# Altium PCB RemoteControlCC1101.PcbDoc
Units mm, origin at the board's own origin, x right, y up, seen from the top; angles counter-clockwise.
Board outline 78.75 x 46.82 mm, 2 copper layers (Top Layer, Bottom Layer); 54 components, 18 nets, 240 pads, 97 vias.
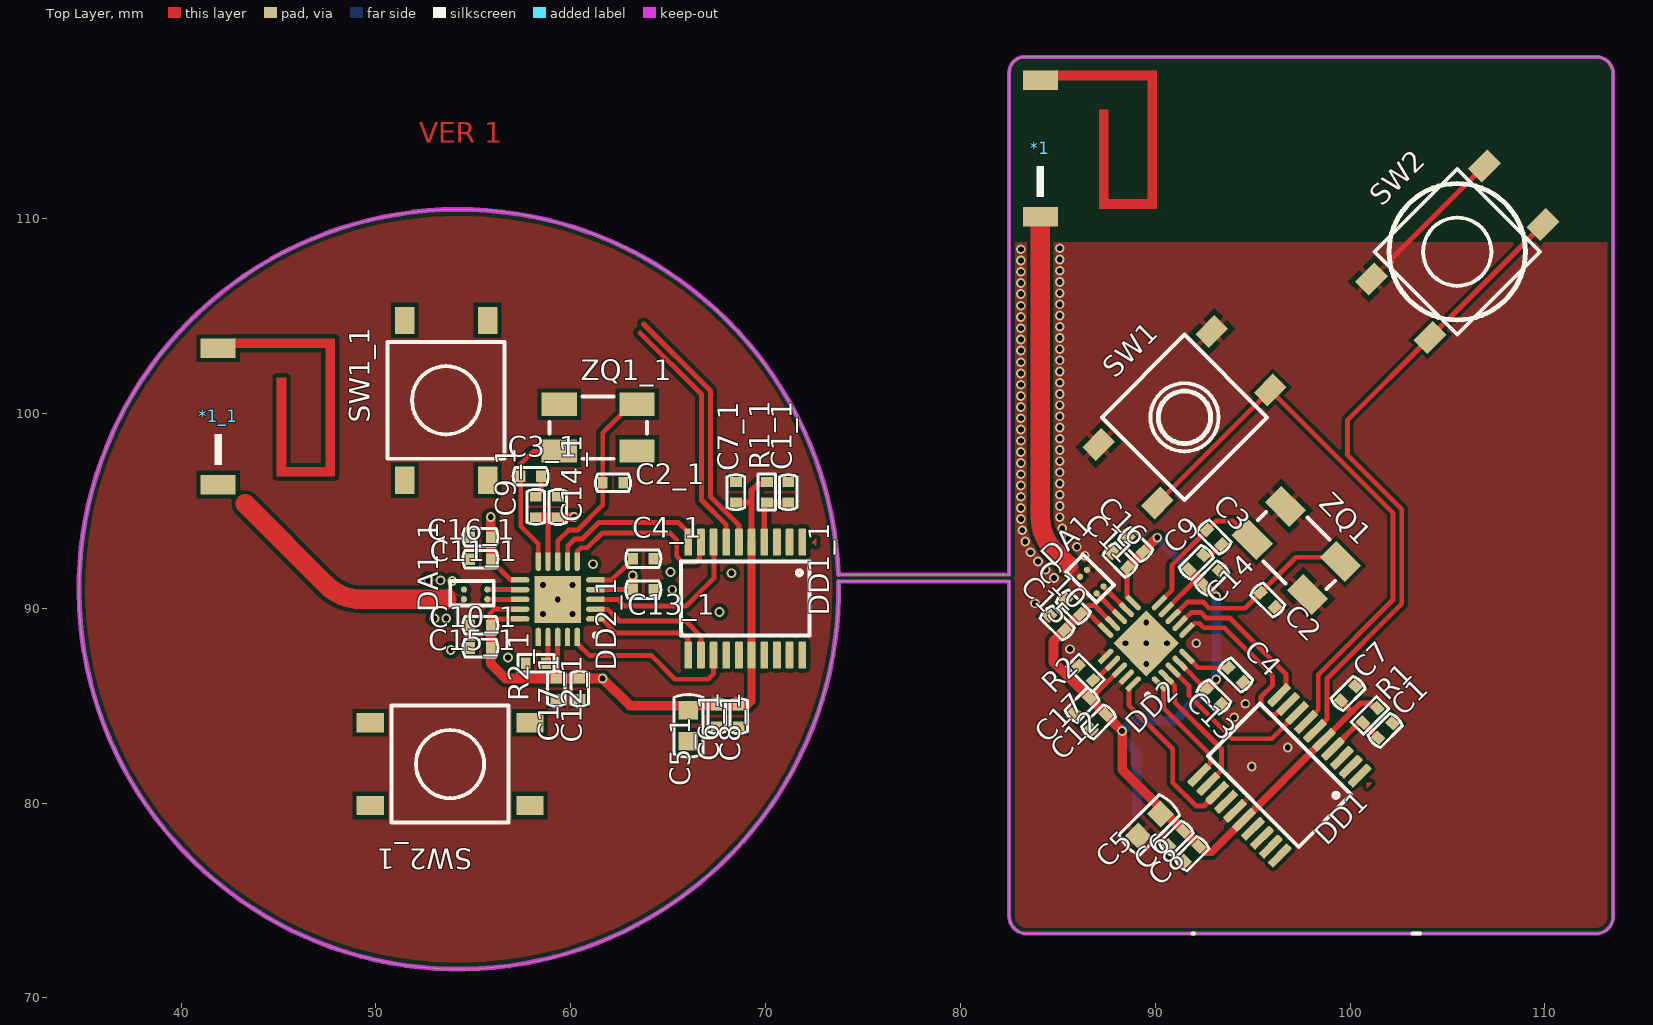
[diagram p0: Top Layer view]
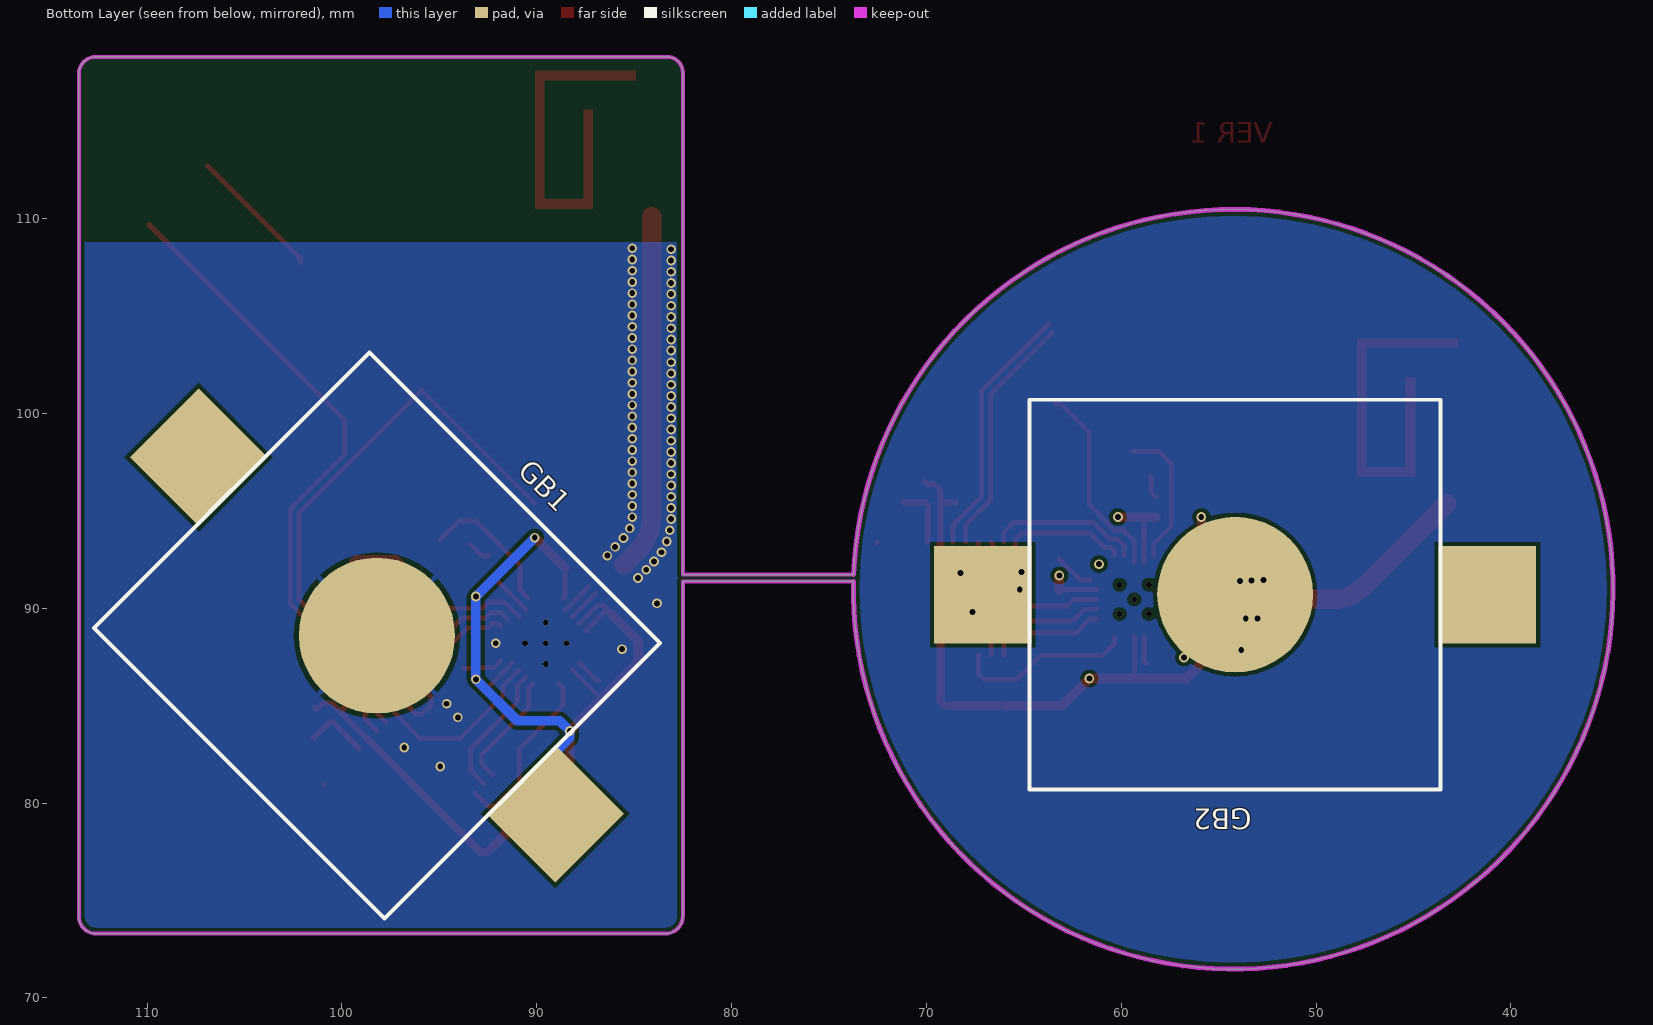
[diagram p1: Bottom Layer view, seen from below]
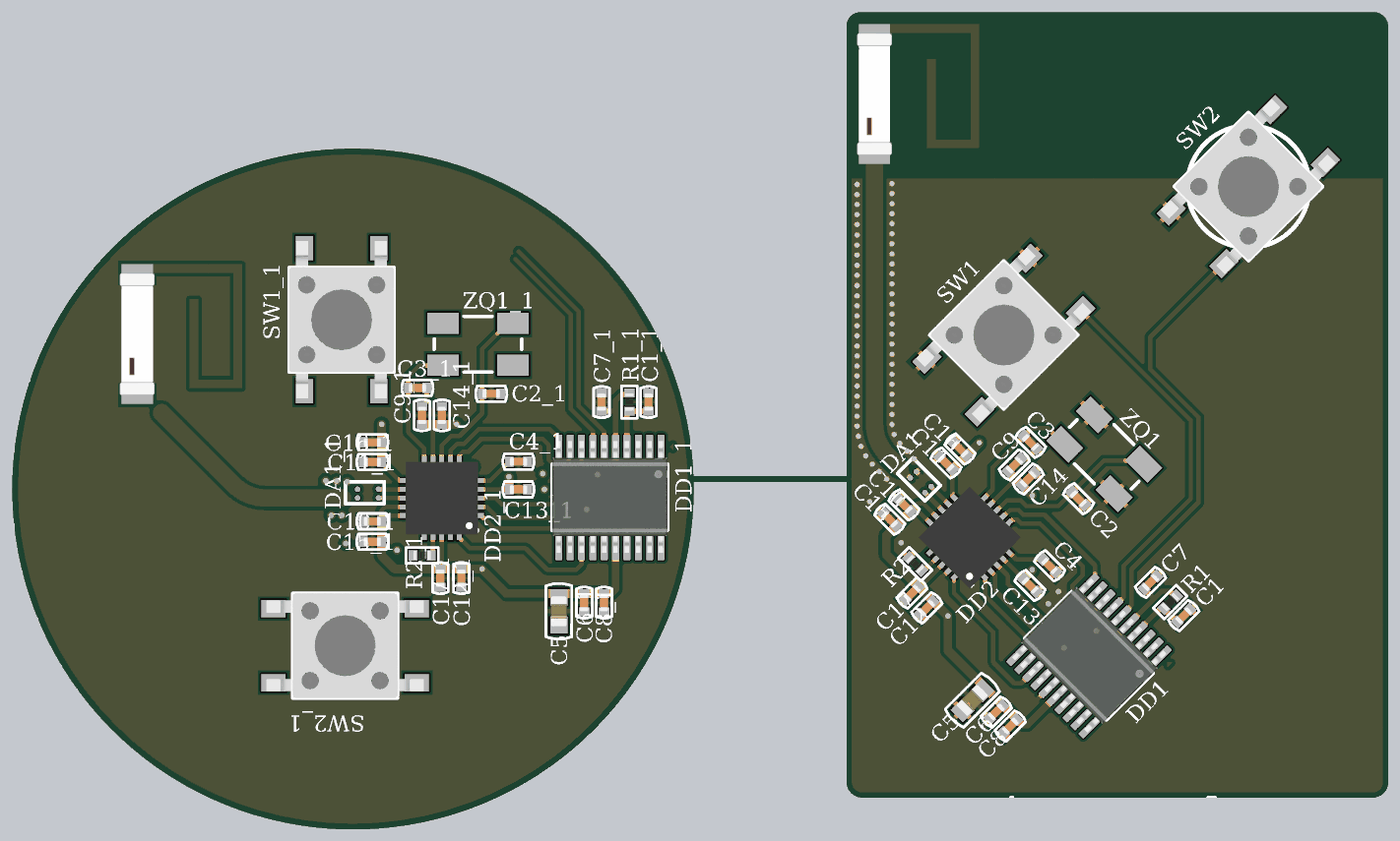
[diagram p2: 3D render of the assembled board from above, using the file's embedded part models]

## Layer stack, top to bottom
Top Solder: solder mask 0.0102, Solder Resist, Dk 3.5
Top Layer: signal copper 0.0356
Dielectric 1: dielectric 0.32, FR-4, Dk 4.8
Bottom Layer: signal copper 0.0356
Bottom Solder: solder mask 0.0102, Solder Resist, Dk 3.5

## Board outline
73.746,91.374 cw(c54.25,90.975) 73.736,91.723 82.5,91.723 82.5,117.5 cw(c83.3,117.5) 83.3,118.3 112.65,118.3 cw(c112.65,117.45) 113.5,117.45 113.5,74.175 cw(c112.625,74.175) 112.625,73.3 83.4,73.3 cw(c83.4,74.2) 82.5,74.2 82.5,91.374

## Design rules (kind name [scope] priority, off if disabled: settings)
Clearance [All] p1: gap=0.2 ignorepadtopadclearanceinfootprint=FALSE except(0: Arc-Hole Track-Hole SMDPad-SMDPad SMDPad-Hole THPad-Hole Via-Hole Fill-Hole Poly-Hole Region-Hole Text-Hole)
ComponentClearance [All] p1: gap=0 collisioncheckmode=3 verticalgap=0 showdistances=FALSE
MinimumSolderMaskSliver [All] p1: minsoldermaskwidth=0
PolygonConnect PolygonConnect_1 [InNet('Net*1_1')] p1: connectstyle=Direct reliefconductorwidth=0.254 reliefentries=4 polygonreliefangle="90 Angle" airgapwidth=0.254
PolygonConnect [All] p2: thpad.connectstyle=Relief thpad.reliefconductorwidth=0.254 thpad.reliefentries=4 thpad.polygonreliefangle="90 Angle" thpad.airgapwidth=0.254 smdpad.connectstyle=Relief smdpad.reliefconductorwidth=0.254 smdpad.reliefentries=4 smdpad.polygonreliefangle="90 Angle" smdpad.airgapwidth=0.254 via.connectstyle=Direct via.reliefconductorwidth=0.254 via.reliefentries=4 via.polygonreliefangle="90 Angle" via.airgapwidth=0.254
RoutingVias [All] p1: holewidth=0.3 width=0.5 viastyle="Through Hole" minholewidth=0.3 minwidth=0.5 maxholewidth=0.3 maxwidth=0.5
SilkToSilkClearance [All] p1: silktosilkclearance=0
SilkToSolderMaskClearance [IsPad] p1: minsilkscreentomaskgap=0 clearancetoexposedcopper=TRUE
SolderMaskExpansion [All] p1: expansion=0.102
Width [All] p1: maxlimit=5 minlimit=0.1 preferedwidth=0.3
26 further rules are at their usual default settings.

## Classes and differential pairs
component class RemoteControlCC1101: *1 C1 C2 C3 C4 C5 C6 C7 C8 C9 C10 C11 C12 C13 C14 C15 C16 C17 DA1 DD1 DD2 GB1 R1 R2 SW1 SW2 ZQ1

## Components (designator, comment, footprint, x,y, rotation, side; value= is the part's Value field where it differs from the comment)
*1 "868 MHz Antenna chip ceramic" 868_chip 84.1,110.1 r90 top
*1_1 "868 MHz Antenna chip ceramic" 868_chip 41.9,96.35 r90 top (schematic designator *1)
C1 "100n" C0402 101.8,83.725 r45 top
C1_1 "100n" C0402 71.163,95.957 r90 top (schematic designator C1)
C2 "10p" C0402 95.775,90.425 r135 top
C2_1 "10p" C0402 62.165,96.435 r180 top (schematic designator C2)
C3 "10p" C0402 93.025,93.65 r135 top
C3_1 "10p" C0402 57.941,96.77 r180 top (schematic designator C3)
C4 "100n" C0402 94.125,86.575 r135 top
C4_1 "100n" C0402 63.721,92.545 r180 top (schematic designator C4)
C5 "1u" C0603 89.7,78.875 r45 top
C5_1 "1u" C0603 66.037,83.972 r90 top (schematic designator C5)
C6 "100n" C0402 91.075,78.2 r225 top
C6_1 "100n" C0402 67.486,84.467 r270 top (schematic designator C6)
C7 "100n" C0402 99.9,85.625 r45 top
C7_1 "100n" C0402 68.476,95.957 r90 top (schematic designator C7)
C8 "10n" C0402 91.875,77.4 r225 top
C8_1 "10n" C0402 68.618,84.467 r270 top (schematic designator C8)
C9 "100n" C0402 92.106,92.352 r45 top
C9_1 "100n" C0402 58.208,95.202 r90 top (schematic designator C9)
C10 "100n" C0402 85.793,90.068 r135 top
C10_1 "100n" C0402 55.36,89.124 r180 top (schematic designator C10)
C11 "100n" C0402 88.193,92.468 r135 top
C11_1 "100n" C0402 55.36,92.518 r180 top (schematic designator C11)
C12 "100n" C0402 87.093,84.168 r225 top
C12_1 "100n" C0402 60.451,85.872 r270 top (schematic designator C12)
C13 "100n" C0402 93.002,85.452 r315 top
C13_1 "100n" C0402 63.721,90.957 r0 top (schematic designator C13)
C14 "1n" C0402 92.902,91.548 r45 top
C14_1 "1n" C0402 59.34,95.197 r90 top (schematic designator C14)
C15 "1n" C0402 84.968,89.243 r135 top
C15_1 "1n" C0402 55.36,87.958 r180 top (schematic designator C15)
C16 "1n" C0402 88.993,93.268 r135 top
C16_1 "1n" C0402 55.36,93.65 r180 top (schematic designator C16)
C17 "1n" C0402 86.243,85.018 r225 top
C17_1 "1n" C0402 59.249,85.872 r270 top (schematic designator C17)
DA1 "BAL-CC1101-01D3" "BGA4x2_BALLUN - duplicate" 86.99,90.765 r135 top
DA1_1 "BAL-CC1101-01D3" "BGA4x2_BALLUN - duplicate" 55.713,90.463 r180 top (schematic designator DA1)
DD1 "STM32L011" TSSOP20 96.375,81.425 r225 top
DD1_1 "STM32L011" TSSOP20 68.954,90.495 r270 top (schematic designator DD1)
DD2 "СС1101" S-PVQFN-N20 90.193,86.132 r135 top
DD2_1 "СС1101" S-PVQFN-N20 61.255,89.452 r180 top (schematic designator DD2)
GB1 "BC-2001" BC-2001 89.043,79.443 r45 bottom locked
GB2 "BC-2001" BC-2001 67.1,90.7 r180 bottom (schematic designator GB1)
R1 "10K" R0402 101.025,84.5 r45 top
R1_1 "10K" R0402 70.067,95.957 r90 top (schematic designator R1)
R2 "Res_0402" R0402 86.425,86.675 r135 top
R2_1 "Res_0402" R0402 58.206,87.171 r180 top (schematic designator R2)
SW1 "KLS7-TS6604-4.3-180" KLS7_6_6_4.3_SMD 91.5,99.8 r225 top
SW1_1 "KLS7-TS6604-4.3-180" KLS7_6_6_4.3_SMD 53.6,100.675 r270 top (schematic designator SW1)
SW2 "KLS7-TS6604-4.3-180" KLS7_6_6_4.3_SMD 105.5,108.3 r225 top
SW2_1 "KLS7-TS6604-4.3-180" KLS7_6_6_4.3_SMD 53.8,82 r0 top (schematic designator SW2)
ZQ1 "ABM3B-8.000MHZ-10-1-U-T" ABM3B 97.243,92.968 r315 top
ZQ1_1 "ABM3B-8.000MHZ-10-1-U-T" ABM3B 61.405,99.271 r0 top (schematic designator ZQ1)

## Footprints (in the part's own frame and the unit in brackets; to place one, negate y for a bottom-side part, rotate by r counter-clockwise, add the part's x,y. Pads: shape width x height; smd on the part's side, far side on the other; paste and mask are expansions set on the pad)
868_chip [mm]
  rect 1x1.8 smd mask+0: 1(0,0) ""(7,0)
  Top Layer region: 0.4,-3.5 5.5,-3.5 5.5,-3 0.4,-3
  Top Layer region: 0.4,-6 0.9,-6 0.9,-3 0.4,-3
  Top Layer region: 0.4,-6 7.5,-6 7.5,-5.5 0.4,-5.5
  Top Layer region: 7,-6 7.5,-6 7.5,-0.8 7,-0.8
  silkscreen extent 1,-0.2 2.6,0.2, body extent 0,-1 7,1, height 0.8
ABM3B [mm] "Площадка для кварцевого резонатора Abracon, монтаж на поверхность 4 конт. Корпус 5х3.2мм."
  rect 1.8x1.2 smd: 1(-2,-1.2) 2(2,-1.2) 3(2,1.2) 4(-2,1.2)
  silkscreen extent -2.5,-1.6 2.5,1.6, body extent -2.4,-1.5 2.4,1.5, height 1.1
BC-2001 [mm]
  rect 5x5 smd: 1(0,0) 1(25.9,0)
  round 8 smd: 2(12.95,0)
  silkscreen extent 2.4,-10 23.5,10, body extent -2.42,-9.8 28.32,10.27, height 3.96
"BGA4x2_BALLUN - duplicate" [mm]
  round 0.32 smd mask+0.05: 1(0,0) 2(0,-0.5) 3(1.2,0) 4(1.2,-0.5)
  silkscreen extent -0.33,-0.93 1.9,0.33
C0402 [mm] "Chip Capacitor, Body 1.0x0.5mm IPC Medium Density"
  rect 0.5x0.6 smd: 1(-0.525,0) 2(0.525,0)
  silkscreen extent -0.9,-0.45 0.9,0.45, body extent -0.5,-0.25 0.5,0.25, height 0.5
C0603 [mm]
  rect 0.95x1 smd: 1(-0.8,0) 2(0.8,0)
  silkscreen extent -1.6,-0.74 1.6,0.74, body extent -0.87,-0.47 0.88,0.48, height 0.87
KLS7_6_6_4.3_SMD [mm]
  rect 1.4x1 smd: 1(-4.1,2.125) 1(4.1,2.125) 2(-4.1,-2.125) 2(4.1,-2.125)
  silkscreen extent -3,-3 3,3, body extent -4.5,-3 4.5,3, height 4.3
R0402 [mm] "Chip Resistor, Body 1.0x0.5mm IPC Medium Density"
  rect 0.5x0.6 smd: 1(-0.525,0) 2(0.525,0)
  silkscreen extent -0.92,-0.45 0.93,0.45, body extent -0.5,-0.25 0.5,0.25, height 0.3
S-PVQFN-N20 [mm]
  rect 0.28x0.28 smd mask+0.102: 1(-0.335,0) 2(-0.335,-0.5) 3(-0.335,-1) 4(-0.335,-1.5) 5(-0.335,-2) 6(0.925,-3.27) 7(1.425,-3.27) 8(1.925,-3.27) 9(2.425,-3.27) 10(2.925,-3.27) 11(4.185,-2) 12(4.185,-1.5) 13(4.185,-1) 14(4.185,-0.5) 15(4.185,0) 16(2.925,1.26) 17(2.425,1.26) 18(1.925,1.26) 19(1.425,1.26) 20(0.925,1.26)
  oval 0.95x0.28 smd: 1(0,0) 2(0,-0.5) 3(0,-1) 4(0,-1.5) 5(0,-2) 11(3.85,-2) 12(3.85,-1.5) 13(3.85,-1) 14(3.85,-0.5) 15(3.85,0)
  oval 0.28x0.95 smd: 6(0.925,-2.925) 7(1.425,-2.925) 8(1.925,-2.925) 9(2.425,-2.925) 10(2.925,-2.925) 16(2.925,0.925) 17(2.425,0.925) 18(1.925,0.925) 19(1.425,0.925) 20(0.925,0.925)
  rect 2.4x2.4 smd mask+0: 21(1.925,-1)
  silkscreen extent -0.09,0.77 0.05,0.91, body extent -0.15,-3.08 4.01,1.08, height 1
TSSOP20 [mm]
  rrect30% 1.4x0.4 smd mask+0.08: 1(-2.9,2.925) 2(-2.9,2.275) 3(-2.9,1.625) 4(-2.9,0.975) 5(-2.9,0.325) 6(-2.9,-0.325) 7(-2.9,-0.975) 8(-2.9,-1.625) 9(-2.9,-2.275) 10(-2.9,-2.925) 11(2.9,-2.925) 12(2.9,-2.275) 13(2.9,-1.625) 14(2.9,-0.975) 15(2.9,-0.325) 16(2.9,0.325) 17(2.9,0.975) 18(2.9,1.625) 19(2.9,2.275) 20(2.9,2.925)
  Top Layer region: -2.9,3.425 -2.718,3.607 -2.735,3.65 -3.065,3.65 -3.082,3.607
  silkscreen extent -1.9,-3.3 1.9,3.3, body extent -3.23,-3.3 3.17,3.3, height 1.1

## Part data
C1 C1_1 C2 C2_1 C3 C3_1 C4 C4_1 C6 C6_1 C7 C7_1 C8 C8_1 C9 C9_1 C10 C10_1 C11 C11_1 C12 C12_1 C13 C13_1 C14 C14_1 C15 C15_1 C16 C16_1 C17 C17_1: library part Cap_Ceramic_NPO_0402, "Cap Ceramic, 0402, 5%, 50V, NPO (C0G), -55 +125C"
C5 C5_1: library part Cap_Ceramic_X7R(X5R)_0603, "Cap Ceramic, 0603, ±10%, 50V, X7R (X5R), -55 +125C (-55 +85C)"
DA1 DA1_1: "50 ohm nominal input / conjugate match balun"
DD1 DD1_1: "Access line ultra-low-power 32-bit MCU Arm®-based / Cortex®-M0+, up to 16KB Flash, 2KB SRAM, 512B EEPROM, ADC"
DD2 DD2_1: "Low-Power Sub-1 GHz RF Transceiver"
GB1 GB2: "2032 holder"
R1 R1_1: library part Res_0402, "Res, 0402, 1%, 1/12W"
R2 R2_1: "Res, 0402, 1%, 1/12W"
SW1 SW1_1 SW2 SW2_1: library part KLS7-TS6604, "Tact Switch, 6x6x4.3mm, SMD", =KLS7
ZQ1 ZQ1_1: "QUARZ, 8МГц (Abracon)"

## Via types
v1: diameter 0.5, hole 0.3, Top Layer to Bottom Layer, tented both sides, 87 vias
v2: diameter 0.3, hole 0.3, Top Layer to Bottom Layer, 10 vias

## Nets (pads, with @x,y where several pads share a name; then routed paths per layer and width w, separated by ;. In a path a pad name is that pad's centre, name@x,y a point inside that pad or via, vN(x,y) a via of type N, cw(c..) or ccw(c..) an arc to the next point about the centre after c; other vN are vias at no path point)
3.3V: C5.2 C6.1 C7.1 C8.1 C9.1 C10.1 C11.1 C12.1 C13.1 C14.1 C15.1 C16.1 C17.1 DD1.5 DD1.16 DD2.4 DD2.9 DD2.11 DD2.14 DD2.15 DD2.18 GB1.1@89.043,79.443 R1.2 | length 64.7
  Top Layer w0.25: C17.1 86.721,85.39 88.17,86.839 DD2.18@88.178,86.839 ; DD2.15@87.471,88.854 87.234,89.091 86.43,89.895 86.363,89.895 C10.1 86.165,89.74 86.575,90.15 86.882,90.15 87.588,89.445 DD2.14@87.825,89.208 ; C11.1 88.547,92.097 88.547,90.607 DD2.11@88.648,90.505 ; DD2.9@90.547,89.915 92.131,91.499 92.216,91.499 ; DD2.4@91.254,87.192 91.258,87.192 92.627,85.823 C13.1
  Top Layer w0.3: DD1.5 100.092,84.683 ; C7.1 100.092,84.69 100.092,84.683 ; R1.2 101.255,84.871 101.001,85.125 100.535,85.125 100.092,84.683
  Top Layer w0.4: C8.1 92.254,77.771 92.552,77.473 92.883,77.473 DD1.16 DD1.5
  Top Layer w0.5: C10.1 C15.1 84.775,88.307 84.775,87.229 C17.1 C12.1 88.3,83.704 v1(88.3,83.7) 88.3,81.725 C5.2@90.4,79.625 ; C11.1 C16.1 90.093,93.625 v1(90.1,93.625) ; C5.2@90.596,79.421 91.504,78.514 C8.1 ; C9.1 92.216,91.499 92.531,91.185 C14.1 93.108,90.6 v1(93.125,90.6) ; C13.1 93.125,86.317 v1(93.125,86.35)
  Bottom Layer w0.5: GB1.1@89.043,79.443 89.043,82.625 88.3,83.368 v1(88.3,83.7) 88.825,84.225 91,84.225 v1(93.125,86.35) v1(93.125,90.6) v1(90.1,93.625)
BTN1: DD1.7 SW1.1 | length 29.7
  Top Layer w0.25: SW1.1@90.103,95.398 95.902,101.197 102.2,94.898 102.2,90.425 98.365,86.59 98.365,84.79 97.74,84.165 DD1.7
BTN2: DD1.6 SW2.1 | length 33.1
  Top Layer w0.25: DD1.6 98.205,83.705 98.815,84.315 98.815,86.39 102.65,90.225 102.65,95.085 99.875,97.86 99.875,99.67 104.103,103.898 SW2.1@109.902,109.697
CS: DD1.10 DD2.7 | length 7.9
  Top Layer w0.25: DD2.7@91.498,89.452 91.519,89.452 91.843,89.775 92.35,89.775 92.625,89.5 93.825,89.5 96.711,86.614 96.711,85.897 DD1.10
GND: C1.2 C2.1 C3.1 C4.1 C5.1 C6.2 C7.2 C8.2 C9.2 C10.2 C11.2 C12.2 C13.2 C14.2 C15.2 C16.2 C17.2 DA1.4 DD1.15 DD2.16 DD2.19 DD2.21 GB1.2 R2.2 SW1.2 SW2.2 ZQ1.2 ZQ1.4 | length 8.1
  Top Layer w0.25: C9.2 92.512,92.688 92.689,92.688 92.724,92.723 92.841,92.723 C3.1 ; 102.125,107.75 102.125,107.93 SW2.2@106.897,112.702
  other v1: 94.95,81.875 96.8,82.85 94.05,84.4 94.625,85.1 85.625,87.9 92.1,88.2 83.825,90.25 84.8,91.55 84.375,91.975 83.975,92.4 86.375,92.7 83.6,92.875 85.975,93.15 83.325,93.425 85.55,93.6 83.175,94 85.225,94.1 83.1,94.575 85.1,94.675 83.1,95.15 85.1,95.25 83.1,95.725 85.1,95.825 83.1,96.3 85.1,96.4 83.1,96.875 85.1,96.975 83.1,97.45 85.1,97.55 83.1,98.025 85.1,98.125 83.1,98.6 85.1,98.7 83.1,99.175 85.1,99.275 83.1,99.75 85.1,99.85 83.1,100.325 85.1,100.425 83.1,100.9 85.1,101 83.1,101.475 85.1,101.575 83.1,102.05 85.1,102.15 83.1,102.625 85.1,102.725 83.1,103.225 85.1,103.3 83.1,103.8 85.1,103.875 83.1,104.375 85.1,104.45 83.1,104.95 85.1,105.025 83.1,105.525 85.1,105.6 83.1,106.125 85.1,106.175 83.1,106.7 85.1,106.75 83.1,107.275 85.1,107.325 83.1,107.85 85.1,107.9 83.1,108.425 85.1,108.475
  other v2: 89.539,87.139 88.479,88.2 89.539,88.2 90.6,88.2 89.539,89.261
MISO: DD1.12 DD2.2 | length 7
  Top Layer w0.25: DD2.2@90.547,86.485 90.547,86.477 91,86.024 91,85.175 93.4,82.775 93.4,81.675 92.716,80.991 DD1.12
MOSI: DD1.13 DD2.20 | length 9.2
  Top Layer w0.25: DD2.20@88.885,86.132 88.648,85.895 88.648,85.027 90.9,82.775 90.9,81.05 92.1,79.85 92.5,79.85 93.173,80.523 DD1.13
Net*1_1: *1.1 DA1.3 | length 18.4
  Top Layer w1: *1.1 84.1,94.702 ccw(c86.64,94.702) 84.844,92.906 85.525,92.225
NetC1_1: C1.1 DD1.4 R1.1 | length 3.2
  Top Layer w0.3: DD1.4 100.485,84.156 100.626,84.156 R1.1 C1.1
NetC2_2: C2.2 DD2.8 ZQ1.3 | length 10.2
  Top Layer w0.25: DD2.8@90.901,89.561 91.664,90.325 92.45,90.325 92.775,90 94.608,90 C2.2 97.222,92.615 99.294,92.615 ZQ1.3
NetC3_2: C3.2 DD2.10 ZQ1.1 | length 7.4
  Top Layer w0.25: DD2.10@90.437,90.512 90.85,90.925 90.85,92.2 92.654,94.004 C3.2 ; C3.2@92.689,94.057 C3.2 ; ZQ1.1 94.941,93.534 94,94.475 93.125,94.475 92.671,94.021 C3.2
NetC4_2: C4.2 DD2.5 | length 2.1
  Top Layer w0.25: DD2.5@91.845,87.309 91.847,87.309 92.21,86.946 93.506,86.946 93.542,86.911 93.718,86.911 C4.2
NetDA1_1: DA1.1 DD2.13 | length 1.7
  Top Layer w0.254: DA1.1 86.99,90.757 88.178,89.568 DD2.13@88.178,89.561
NetDA1_2: DA1.2 DD2.12 | length 1.7
  Top Layer w0.254: DA1.2 87.343,91.11 88.532,89.922 DD2.12@88.532,89.915
NetDD2_17: DD2.17 R2.1 | length 1.4
  Top Layer w0.25: R2.1 86.928,86.304 87.816,87.192 DD2.17@87.825,87.192
READY: DD1.8 DD2.3 | length 8.7
  Top Layer w0.25: DD2.3@90.901,86.839 91.725,86.014 91.725,85.525 93.95,83.3 95.975,83.3 97.277,84.602 DD1.8
SCK: DD1.11 DD2.1 | length 6
  Top Layer w0.25: DD2.1@90.193,86.132 90.43,85.895 90.43,84.87 92.825,82.475 92.825,82.025 92.256,81.456 DD1.11
TX_END: DD1.9 DD2.6 | length 8.9
  Top Layer w0.25: DD2.6@91.852,89.098 91.873,89.098 92.003,89.228 92.26,89.228 92.489,89 93.55,89 96.025,86.525 96.025,86.05 95.421,85.446 95.421,85.029 95.9,84.55 96.177,84.55 96.711,85.084 DD1.9
pads on no net: *1. *1_1. *1_1.1 C1_1.1 C1_1.2 C2_1.1 C2_1.2 C3_1.1 C3_1.2 C4_1.1 C4_1.2 C5_1.1 C5_1.2 C6_1.1 C6_1.2 C7_1.1 C7_1.2 C8_1.1 C8_1.2 C9_1.1 C9_1.2 C10_1.1 C10_1.2 C11_1.1 C11_1.2 C12_1.1 C12_1.2 C13_1.1 C13_1.2 C14_1.1 C14_1.2 C15_1.1 C15_1.2 C16_1.1 C16_1.2 C17_1.1 C17_1.2 DA1_1.1 DA1_1.2 DA1_1.3 DA1_1.4 DD1.1 DD1.2 DD1.3 DD1.14 DD1.17 DD1.18 DD1.19 DD1.20 DD1_1.1 DD1_1.2 DD1_1.3 DD1_1.4 DD1_1.5 DD1_1.6 DD1_1.7 DD1_1.8 DD1_1.9 DD1_1.10 DD1_1.11 DD1_1.12 DD1_1.13 DD1_1.14 DD1_1.15 DD1_1.16 DD1_1.17 DD1_1.18 DD1_1.19 DD1_1.20 DD2_1.1 DD2_1.2 DD2_1.3 DD2_1.4 DD2_1.5 DD2_1.6 DD2_1.7 DD2_1.8 DD2_1.9 DD2_1.10 DD2_1.11 DD2_1.12 DD2_1.13 DD2_1.14 DD2_1.15 DD2_1.16 DD2_1.17 DD2_1.18 DD2_1.19 DD2_1.20 DD2_1.21 GB1.1@107.357,97.757 GB2.1 GB2.2 R1_1.1 R1_1.2 R2_1.1 R2_1.2 SW1_1.1 SW1_1.2 SW2_1.1 SW2_1.2 ZQ1_1.1 ZQ1_1.2 ZQ1_1.3 ZQ1_1.4
copper on no net: | length 160.3
  Top Layer w0.25: 55.885,92.518 55.872,92.506 56.926,91.452 57.07,91.452 ; 57.405,89.452 57.07,89.452 55.932,89.452 55.885,89.404 55.885,89.124 55.855,89.154 55.855,89.735 56.072,89.952 57.07,89.952 57.405,89.952 ; 57.416,96.82 57.416,96.77 ; 58.208,95.727 58.258,95.727 58.383,95.852 58.383,95.902 58.466,95.985 58.466,96.77 ; 58.33,92.722 58.33,93.306 57.428,94.207 57.428,96.758 57.416,96.77 ; 58.731,87.171 58.824,87.265 58.824,88.521 58.83,88.527 ; 58.83,92.377 58.83,94.617 58.89,94.677 ; 59.249,86.397 59.324,86.472 59.324,88.521 59.33,88.527 ; 59.33,92.377 59.33,93.457 59.885,94.013 60.345,94.013 61.64,95.309 61.64,96.435 61.64,99.006 63.105,100.471 63.405,100.471 ; 59.405,98.071 59.377,98.043 58.047,98.043 57.428,97.425 57.428,96.783 57.416,96.77 ; 59.83,92.722 59.845,92.737 59.845,93.194 60.203,93.553 60.592,93.553 61.441,94.402 65.522,94.402 66.029,93.895 66.029,93.395 ; 60.33,88.527 60.33,88.192 60.943,87.578 64.128,87.578 65.347,86.358 67.045,86.358 67.327,86.641 67.327,87.594 67.329,87.595 ; 60.33,92.722 60.345,92.737 60.345,92.921 60.526,93.103 60.849,93.103 61.6,93.854 65.1,93.854 65.436,93.518 65.436,92.663 65.73,92.369 66.408,92.369 66.604,92.564 66.604,93.32 66.679,93.395 ; 61.255,89.452 61.59,89.452 62.314,88.727 65.701,88.727 66.019,88.409 66.019,87.604 66.029,87.595 ; 61.255,89.952 61.26,89.946 61.901,89.946 62.501,89.346 65.895,89.346 66.673,88.568 66.673,87.6 66.679,87.595 ; 61.255,90.452 62.421,90.452 62.767,90.106 65.913,90.106 67.345,91.538 67.345,93.379 67.329,93.395 ; 61.255,90.952 61.257,90.954 63.194,90.954 63.196,90.957 ; 61.59,91.452 61.591,91.454 62.105,91.454 63.021,92.37 63.071,92.37 63.196,92.495 63.196,92.545 ; 63.546,104.141 66.709,100.978 66.709,95.554 67.981,94.281 67.981,93.398 67.979,93.395 ; 63.732,104.591 67.168,101.155 67.168,95.731 68.636,94.264 68.636,93.402 68.629,93.395
  Top Layer w0.254: 55.713,90.463 55.719,90.457 57.4,90.457 57.405,90.452 ; 55.713,90.963 55.719,90.957 57.4,90.957 57.405,90.952
  Top Layer w0.3: 68.476,95.432 69.273,95.432 69.279,95.427 ; 69.279,93.395 69.279,95.427 ; 69.929,93.395 69.929,95.332 70.029,95.432 70.067,95.432 71.163,95.432 ; 70.067,96.482 69.967,96.382 69.609,96.382 69.279,96.052 69.279,95.427
  Top Layer w0.4: 68.618,84.992 68.623,84.997 69.044,84.997 69.279,85.231 69.279,87.595 69.279,93.395
  Top Layer w0.5: 55.885,89.124 55.885,87.958 55.885,87.159 56.647,86.397 59.249,86.397 60.451,86.397 61.632,86.397 v1(61.635,86.394) 63.032,84.997 66.002,84.997 ; 55.885,92.518 55.885,93.65 55.885,94.679 v1(55.89,94.684) ; 58.208,94.677 58.89,94.677 59.334,94.677 59.34,94.672 60.156,94.672 v1(60.168,94.684) ; v1(63.173,91.679) 63.196,91.656 63.196,90.957 ; 66.284,84.992 67.568,84.992 68.618,84.992
  Top Layer w1: 43.295,95.355 47.447,91.203 ccw(c49.243,93) 49.243,90.46 51.482,90.46 52.682,90.46 53.645,90.46
  other v1: 56.774,87.472 53.839,87.861 53.008,89.47 53.609,89.47 67.628,89.805 65.206,90.954 53.91,91.396 52.69,91.449 53.309,91.432 68.247,91.803 65.118,91.856 61.14,92.263
  other v2: 58.58,89.702 60.08,89.702 59.33,90.452 58.58,91.202 60.08,91.202

## Polygon pours and split planes (outlines as drawn)
GND on Top Layer (solid, pour order 16): 54.225,71.5 cw(c54.225,91) 34.725,91 cw(c54.225,91) 54.225,110.5 cw(c54.225,91) 73.725,91 cw(c54.225,91)
no net on Top Layer (solid, pour order 12): 53.375,73.15
no net on Top Layer "ant" (solid, pour order 8): 54.511,90.619 54.428,90.619 cw(c54.428,91.101) 54.087,90.76 54.067,90.779 ccw(c53.645,90.357) 53.645,90.954 53.645,89.965 ccw(c53.645,90.562) 54.067,90.14 54.104,90.177 cw(c54.403,89.878) 54.403,90.3 54.511,90.3
GND on Top Layer "Top Layer-GND" (solid, pour order 4): 82.5,108.775 82.5,73.3 113.5,73.3 113.5,108.775
Net*1_1 on Top Layer "ant" (solid, pour order 0): 86.25,91.725 86.191,91.784 cw(c86.533,92.125) 86.05,92.125 86.05,92.153 ccw(c85.453,92.153) 85.875,92.575 85.175,91.875 ccw(c85.597,92.297) 85.597,91.7 85.65,91.7 cw(c85.65,91.278) 85.949,91.576 86.025,91.5
GND on Bottom Layer (solid, pour order 18): 54.225,71.5 cw(c54.225,91) 34.725,91 cw(c54.225,91) 54.225,110.5 cw(c54.225,91) 73.725,91 cw(c54.225,91)
GND on Bottom Layer "Bottom Layer-GND" (solid, pour order 2): 82.5,108.775 82.5,73.3 113.5,73.3 113.5,108.775

## Keep-outs
Keep-Out Layer:
  lines w0.2: 73.736,91.723 82.5,91.723 82.5,117.5 cw(c83.3,117.5) 83.3,118.3 112.65,118.3 cw(c112.65,117.45) 113.5,117.45 113.5,74.175 cw(c112.625,74.175) 112.625,73.3 83.4,73.3 cw(c83.4,74.2) 82.5,74.2 82.5,90.975 82.5,91.374 73.746,91.374
  lines w0.254: 73.736,91.723 ccw(c54.25,90.975) 73.746,91.374

## Other copper
Top Layer:
  region: 64.852,84.648
  region net 3.3V: 89.341,80.191
  text "VER 2" at 96.375,121.875 h1.8
  text "VER 1" at 52.225,113.525 h1.8

## Silkscreen, mask and mechanical layers (free items; w line width, h text height)
Top Overlay:
  circle w0.254: c91.5,99.8 r1.345
  circle w0.254: c105.5,108.3 r3.5
  lines w0.2: 91.9,73.3 92,73.3 ; 103.2,73.3 103.6,73.3